# Altium PCB NEpic.PcbDoc (part 4 of 5)
Units mil, origin at the board's own origin, x right, y up, seen from the top; angles counter-clockwise.
Board outline 1660 x 1990 mil, 4 copper layers (Top Layer, GND, VCC, Bottom Layer); 30 components, 61 nets, 194 pads, 84 vias.
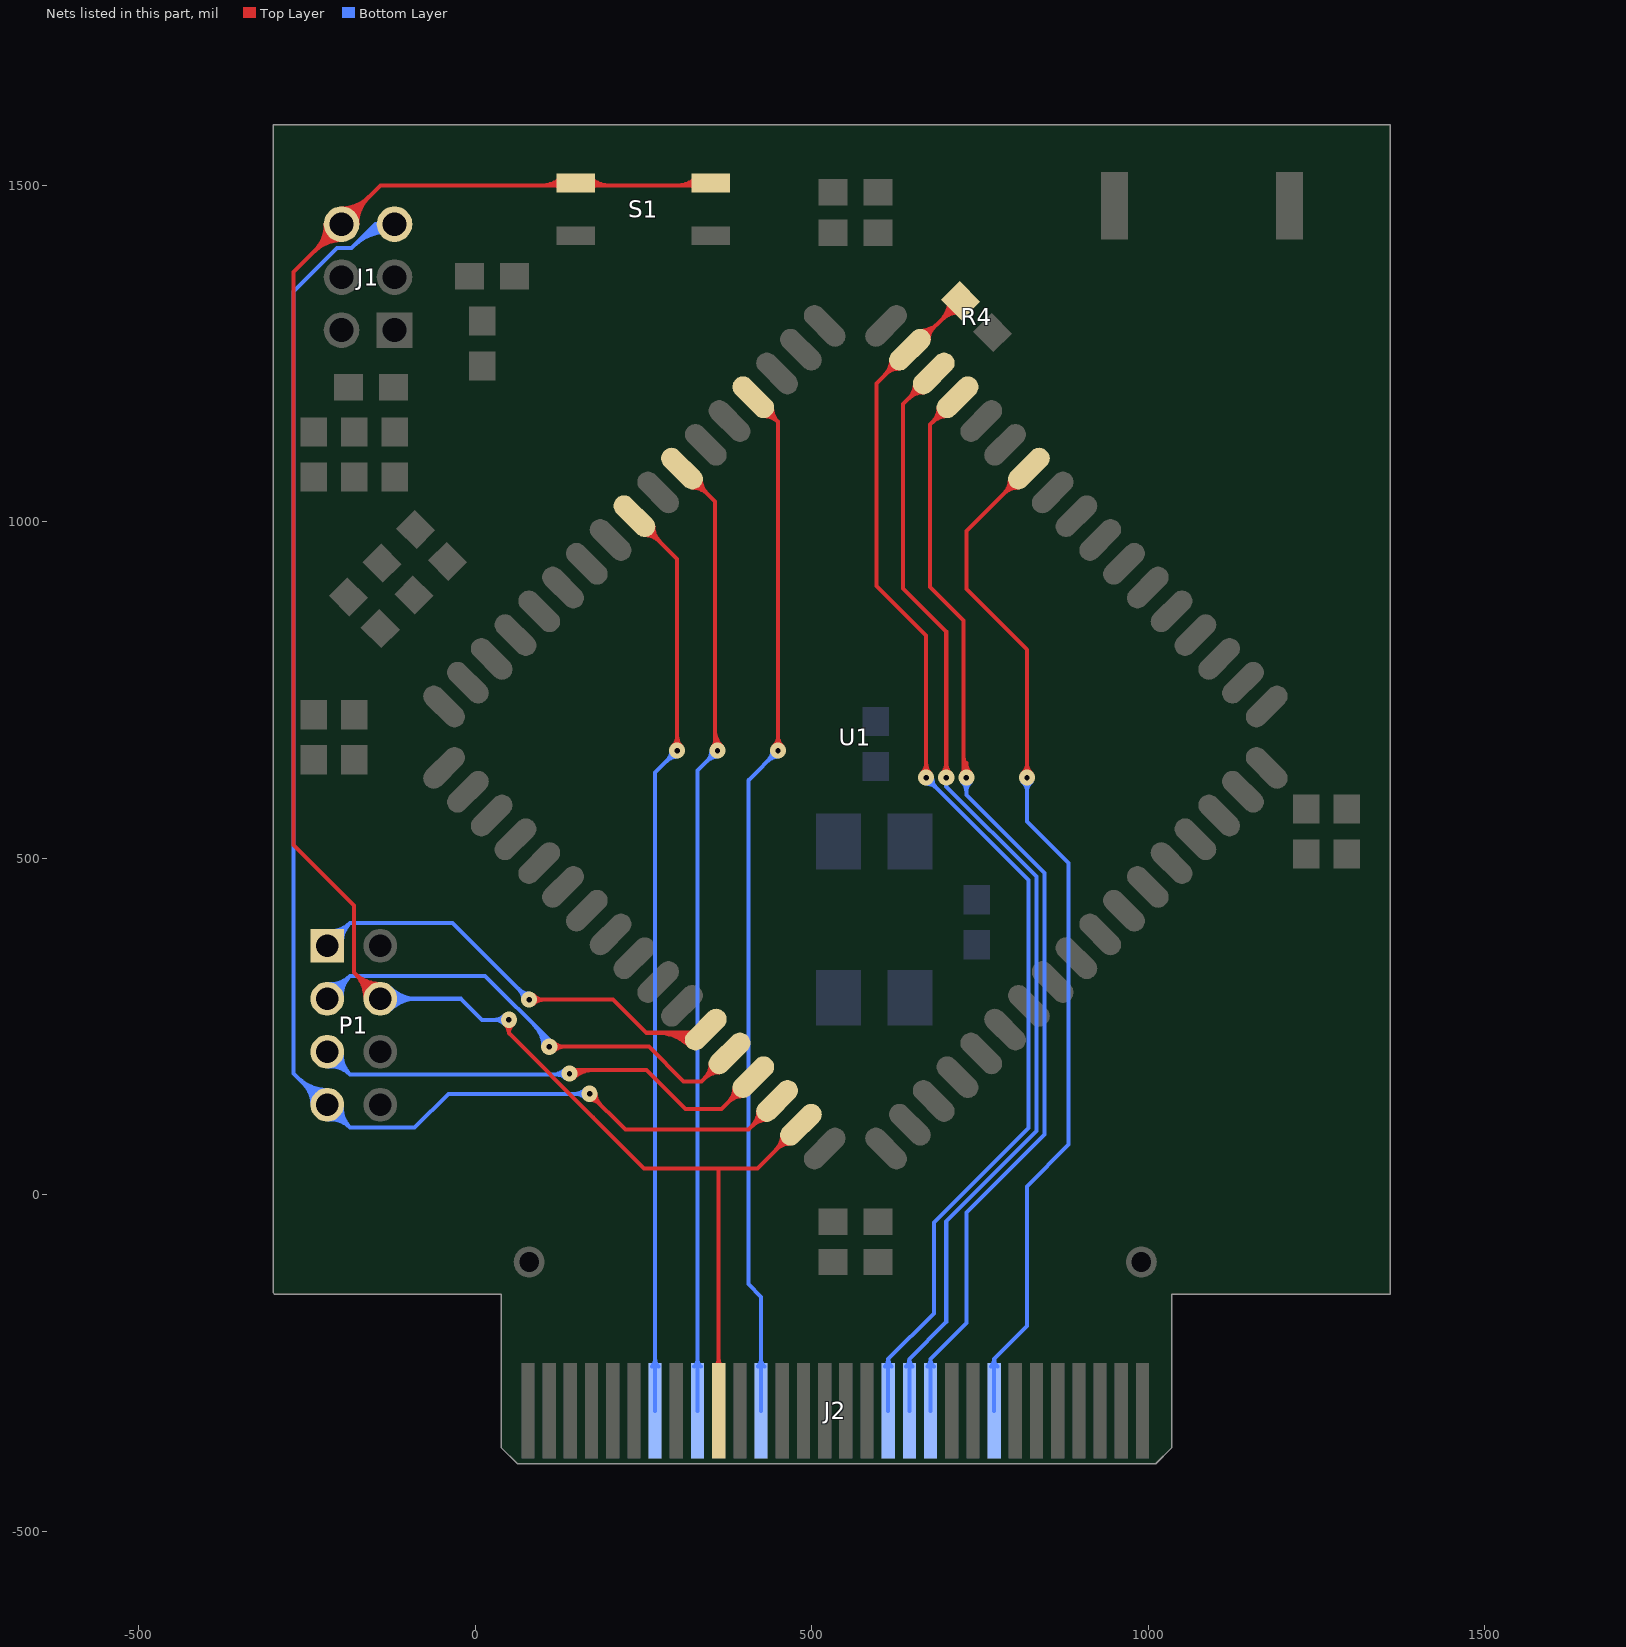
[diagram p6: the nets of this part, all layers, seen from the top]

## Via types
v1: diameter 24, hole 8, Top Layer to Bottom Layer, tented both sides, 78 vias
v2: diameter 150, hole 126, Top Layer to Bottom Layer, 4 vias
v3: diameter 40, hole 20, Top Layer to Bottom Layer, tented both sides, 2 vias

## Nets (pads, with @x,y where several pads share a name; then routed paths per layer and width w, separated by ;. In a path a pad name is that pad's centre, name@x,y a point inside that pad or via, vN(x,y) a via of type N, cw(c..) or ccw(c..) an arc to the next point about the centre after c; other vN are vias at no path point) (continued)
RADIO_CCA: J2.23 U1.49 | length 2254.2
  Top Layer w6: U1.49@681.37,1220.63 636,1175.26 636,1044 636,1014 636,901 700,837 v1(700,620) ; 644.29,1183.56 cw(c666.05,1161.79) U1.49@666.05,1192.57 ; 644.29,1183.56 ccw(c622.53,1205.32) U1.49@653.31,1205.32 ; 644.29,1183.56 cw(c666.05,1161.79) U1.49@666.05,1192.57 ; 644.29,1183.56 ccw(c622.53,1205.32) U1.49@653.31,1205.32 ; 644.29,1183.56 cw(c666.05,1161.79) U1.49@666.05,1192.57 ; 644.29,1183.56 ccw(c622.53,1205.32) U1.49@653.31,1205.32 ; 644.29,1183.56 ccw(c622.53,1205.32) U1.49@653.31,1205.32 ; 644.29,1183.56 cw(c666.05,1161.79) U1.49@666.05,1192.57 ; 654.54,1193.8 cw(c666.05,1182.28) U1.49@666.05,1198.57 ; 654.54,1193.8 ccw(c643.02,1205.32) U1.49@659.31,1205.32 ; 654.54,1193.8 cw(c666.05,1182.28) U1.49@666.05,1198.57 ; 654.54,1193.8 ccw(c643.02,1205.32) U1.49@659.31,1205.32 ; 654.54,1193.8 cw(c666.05,1182.28) U1.49@666.05,1198.57 ; 654.54,1193.8 ccw(c643.02,1205.32) U1.49@659.31,1205.32 ; 654.54,1193.8 ccw(c643.02,1205.32) U1.49@659.31,1205.32 ; 654.54,1193.8 cw(c666.05,1182.28) U1.49@666.05,1198.57 ; v1@693.64,626.36 ccw(c678.27,641.73) 700,641.73 ; v1@693.64,626.36 ccw(c678.27,641.73) 700,641.73 ; v1@693.64,626.36 ccw(c678.27,641.73) 700,641.73 ; v1@693.64,626.36 ccw(c678.27,641.73) 700,641.73 ; 700,641.73 ccw(c721.73,641.73) v1@706.36,626.36 ; 700,641.73 ccw(c721.73,641.73) v1@706.36,626.36 ; 700,641.73 ccw(c721.73,641.73) v1@706.36,626.36 ; 700,641.73 ccw(c721.73,641.73) v1@706.36,626.36
  Bottom Layer w6: J2.23@645.24,-321.26 645.24,-244 ; v1(700,620) 700,606.97 834,472.97 834,94.43 700,-39.57 700,-189.24 645.24,-244 ; J2.23@640.46,-255.34 ccw(c629.4,-244) 645.24,-244 ; J2.23@640.46,-255.34 ccw(c629.4,-244) 645.24,-244 ; J2.23@640.46,-255.34 ccw(c629.4,-244) 645.24,-244 ; J2.23@640.46,-255.34 ccw(c629.4,-244) 645.24,-244 ; 645.24,-244 ccw(c661.08,-244) J2.23@650.01,-255.34 ; 645.24,-244 ccw(c661.08,-244) J2.23@650.01,-255.34 ; 645.24,-244 ccw(c661.08,-244) J2.23@650.01,-255.34 ; 645.24,-244 ccw(c661.08,-244) J2.23@650.01,-255.34
RADIO_CS: J2.21 U1.48 | length 2350.8
  Top Layer w6: U1.48@716.72,1185.28 676,1144.55 676,1014 676,903.09 725.79,853.3 725.79,624.21 v1(730,620) ; 725.79,631.56 cw(c718.44,631.56) v1@723.64,626.36 ; 725.79,637.41 ccw(c747.41,637.41) v1@732.12,622.12 ; 725.79,651.89 ccw(c761.89,651.89) v1@736.36,626.36 ; 679.65,1148.2 cw(c701.41,1126.44) U1.48@701.41,1157.22 ; 679.65,1148.2 ccw(c657.89,1169.96) U1.48@688.66,1169.96 ; 679.65,1148.2 cw(c701.41,1126.44) U1.48@701.41,1157.22 ; 679.65,1148.2 ccw(c657.89,1169.96) U1.48@688.66,1169.96 ; 679.65,1148.2 cw(c701.41,1126.44) U1.48@701.41,1157.22 ; 679.65,1148.2 ccw(c657.89,1169.96) U1.48@688.66,1169.96 ; 679.65,1148.2 ccw(c657.89,1169.96) U1.48@688.66,1169.96 ; 679.65,1148.2 cw(c701.41,1126.44) U1.48@701.41,1157.22 ; 689.89,1158.45 cw(c701.41,1146.93) U1.48@701.41,1163.22 ; 689.89,1158.45 ccw(c678.37,1169.96) U1.48@694.66,1169.96 ; 689.89,1158.45 cw(c701.41,1146.93) U1.48@701.41,1163.22 ; 689.89,1158.45 ccw(c678.37,1169.96) U1.48@694.66,1169.96 ; 689.89,1158.45 cw(c701.41,1146.93) U1.48@701.41,1163.22 ; 689.89,1158.45 ccw(c678.37,1169.96) U1.48@694.66,1169.96 ; 689.89,1158.45 ccw(c678.37,1169.96) U1.48@694.66,1169.96 ; 689.89,1158.45 cw(c701.41,1146.93) U1.48@701.41,1163.22 ; v1@723.64,626.36 ccw(c708.27,641.73) 730,641.73 ; v1@723.64,626.36 ccw(c708.27,641.73) 730,641.73 ; v1@723.64,626.36 ccw(c708.27,641.73) 730,641.73 ; 730,641.73 ccw(c751.73,641.73) v1@736.36,626.36 ; 730,641.73 ccw(c751.73,641.73) v1@736.36,626.36 ; 730,641.73 ccw(c751.73,641.73) v1@736.36,626.36
  Bottom Layer w6: J2.21@676.73,-321.26 676.73,-244 ; v1(730,620) 730,593.94 846,477.94 846,89.46 730,-26.54 730,-190.73 676.73,-244 ; J2.21@671.95,-255.34 ccw(c660.89,-244) 676.73,-244 ; J2.21@671.95,-255.34 ccw(c660.89,-244) 676.73,-244 ; J2.21@671.95,-255.34 ccw(c660.89,-244) 676.73,-244 ; J2.21@671.95,-255.34 ccw(c660.89,-244) 676.73,-244 ; 676.73,-244 ccw(c692.57,-244) J2.21@681.51,-255.34 ; 676.73,-244 ccw(c692.57,-244) J2.21@681.51,-255.34 ; 676.73,-244 ccw(c692.57,-244) J2.21@681.51,-255.34 ; 676.73,-244 ccw(c692.57,-244) J2.21@681.51,-255.34 ; v1@723.64,613.64 cw(c708.27,598.27) 730,598.27 ; v1@723.64,613.64 cw(c708.27,598.27) 730,598.27 ; v1@723.64,613.64 cw(c708.27,598.27) 730,598.27 ; v1@723.64,613.64 cw(c708.27,598.27) 730,598.27 ; 730,598.27 cw(c751.73,598.27) v1@736.36,613.64 ; 730,598.27 cw(c751.73,598.27) v1@736.36,613.64 ; 730,598.27 cw(c751.73,598.27) v1@736.36,613.64 ; 730,598.27 cw(c751.73,598.27) v1@736.36,613.64
RADIO_SFD: J2.25 R4.1 U1.50 | length 2893
  Top Layer w6: v1(670,620) 670,831 596,905 596,1205.97 U1.50@646.01,1255.99 648.66,1255.99 R4.1@721.34,1328.66 ; 608.94,1218.91 cw(c630.7,1197.15) U1.50@630.7,1227.93 ; 608.94,1218.91 ccw(c587.18,1240.67) U1.50@617.95,1240.67 ; 608.94,1218.91 cw(c630.7,1197.15) U1.50@630.7,1227.93 ; 608.94,1218.91 ccw(c587.18,1240.67) U1.50@617.95,1240.67 ; 608.94,1218.91 cw(c630.7,1197.15) U1.50@630.7,1227.93 ; 608.94,1218.91 ccw(c587.18,1240.67) U1.50@617.95,1240.67 ; 608.94,1218.91 ccw(c587.18,1240.67) U1.50@617.95,1240.67 ; 608.94,1218.91 cw(c630.7,1197.15) U1.50@630.7,1227.93 ; 619.18,1229.16 cw(c630.7,1217.64) U1.50@630.7,1233.93 ; 619.18,1229.16 ccw(c607.66,1240.67) U1.50@623.95,1240.67 ; 619.18,1229.16 cw(c630.7,1217.64) U1.50@630.7,1233.93 ; 619.18,1229.16 ccw(c607.66,1240.67) U1.50@623.95,1240.67 ; 619.18,1229.16 cw(c630.7,1217.64) U1.50@630.7,1233.93 ; 619.18,1229.16 ccw(c607.66,1240.67) U1.50@623.95,1240.67 ; 619.18,1229.16 ccw(c607.66,1240.67) U1.50@623.95,1240.67 ; 619.18,1229.16 cw(c630.7,1217.64) U1.50@630.7,1233.93 ; v1@663.64,626.36 ccw(c648.27,641.73) 670,641.73 ; v1@663.64,626.36 ccw(c648.27,641.73) 670,641.73 ; v1@663.64,626.36 ccw(c648.27,641.73) 670,641.73 ; v1@663.64,626.36 ccw(c648.27,641.73) 670,641.73 ; 670,641.73 ccw(c691.73,641.73) v1@676.36,626.36 ; 670,641.73 ccw(c691.73,641.73) v1@676.36,626.36 ; 670,641.73 ccw(c691.73,641.73) v1@676.36,626.36 ; 670,641.73 ccw(c691.73,641.73) v1@676.36,626.36 ; 692.85,1300.18 cw(c721.34,1271.7) 721.34,1311.98 ccw(c721.34,1271.7) 692.85,1300.18 ; 692.85,1300.18 ccw(c664.37,1328.66) 704.65,1328.66 cw(c664.37,1328.66) 692.85,1300.18 ; 703.1,1310.42 cw(c721.34,1292.18) 721.34,1317.98 ccw(c721.34,1292.18) 703.1,1310.42 ; 703.1,1310.42 ccw(c684.86,1328.66) 710.65,1328.66 cw(c684.86,1328.66) 703.1,1310.42 ; U1.50@661.32,1278.05 ccw(c661.32,1300.73) 677.36,1284.69 cw(c661.32,1300.73) U1.50@661.32,1278.05 ; U1.50@661.32,1284.05 ccw(c661.32,1321.21) 687.61,1294.93 cw(c661.32,1321.21) U1.50@661.32,1284.05 ; U1.50@674.07,1271.3 cw(c698.45,1271.3) 681.21,1288.54 ccw(c698.45,1271.3) U1.50@674.07,1271.3
  Bottom Layer w6: J2.25@613.74,-321.26 613.74,-244 ; v1(670,620) 822,468 822,99.41 681.5,-41.09 681.5,-176.24 613.74,-244 ; J2.25@608.96,-255.34 ccw(c597.9,-244) 613.74,-244 ; J2.25@608.96,-255.34 ccw(c597.9,-244) 613.74,-244 ; J2.25@608.96,-255.34 ccw(c597.9,-244) 613.74,-244 ; J2.25@608.96,-255.34 ccw(c597.9,-244) 613.74,-244 ; 613.74,-244 ccw(c629.58,-244) J2.25@618.52,-255.34 ; 613.74,-244 ccw(c629.58,-244) J2.25@618.52,-255.34 ; 613.74,-244 ccw(c629.58,-244) J2.25@618.52,-255.34 ; 613.74,-244 ccw(c629.58,-244) J2.25@618.52,-255.34 ; v1@670,611 cw(c670,589.27) 685.36,604.64 ; v1@670,611 cw(c670,589.27) 685.36,604.64 ; v1@670,611 cw(c670,589.27) 685.36,604.64 ; v1@670,611 cw(c670,589.27) 685.36,604.64 ; v1@679,620 ccw(c700.73,620) 685.36,604.64 ; v1@679,620 ccw(c700.73,620) 685.36,604.64 ; v1@679,620 ccw(c700.73,620) 685.36,604.64 ; v1@679,620 ccw(c700.73,620) 685.36,604.64
RFTXRX: J2.15 U1.45 | length 2217.6
  Top Layer w6: v1(820,620) 820,810 730,900 730,986.42 U1.45@822.79,1079.21 ; 785.71,1042.14 cw(c807.48,1020.37) U1.45@807.48,1051.15 ; 785.71,1042.14 ccw(c763.95,1063.9) U1.45@794.73,1063.9 ; 785.71,1042.14 cw(c807.48,1020.37) U1.45@807.48,1051.15 ; 785.71,1042.14 ccw(c763.95,1063.9) U1.45@794.73,1063.9 ; 785.71,1042.14 cw(c807.48,1020.37) U1.45@807.48,1051.15 ; 785.71,1042.14 ccw(c763.95,1063.9) U1.45@794.73,1063.9 ; 785.71,1042.14 ccw(c763.95,1063.9) U1.45@794.73,1063.9 ; 785.71,1042.14 cw(c807.48,1020.37) U1.45@807.48,1051.15 ; 795.96,1052.38 cw(c807.48,1040.86) U1.45@807.48,1057.15 ; 795.96,1052.38 ccw(c784.44,1063.9) U1.45@800.73,1063.9 ; 795.96,1052.38 cw(c807.48,1040.86) U1.45@807.48,1057.15 ; 795.96,1052.38 ccw(c784.44,1063.9) U1.45@800.73,1063.9 ; 795.96,1052.38 ccw(c784.44,1063.9) U1.45@800.73,1063.9 ; 795.96,1052.38 cw(c807.48,1040.86) U1.45@807.48,1057.15 ; 795.96,1052.38 ccw(c784.44,1063.9) U1.45@800.73,1063.9 ; 795.96,1052.38 cw(c807.48,1040.86) U1.45@807.48,1057.15 ; v1@813.64,626.36 ccw(c798.27,641.73) 820,641.73 ; v1@813.64,626.36 ccw(c798.27,641.73) 820,641.73 ; v1@813.64,626.36 ccw(c798.27,641.73) 820,641.73 ; v1@813.64,626.36 ccw(c798.27,641.73) 820,641.73 ; 820,641.73 ccw(c841.73,641.73) v1@826.36,626.36 ; 820,641.73 ccw(c841.73,641.73) v1@826.36,626.36 ; 820,641.73 ccw(c841.73,641.73) v1@826.36,626.36 ; 820,641.73 ccw(c841.73,641.73) v1@826.36,626.36
  Bottom Layer w6: J2.15@771.22,-321.26 771.22,-244 ; v1(820,620) 820,554.85 882,492.85 882,74.55 820,12.55 820,-195.22 771.22,-244 ; J2.15@766.44,-255.34 ccw(c755.38,-244) 771.22,-244 ; J2.15@766.44,-255.34 ccw(c755.38,-244) 771.22,-244 ; J2.15@766.44,-255.34 ccw(c755.38,-244) 771.22,-244 ; J2.15@766.44,-255.34 ccw(c755.38,-244) 771.22,-244 ; 771.22,-244 ccw(c787.06,-244) J2.15@776,-255.34 ; 771.22,-244 ccw(c787.06,-244) J2.15@776,-255.34 ; 771.22,-244 ccw(c787.06,-244) J2.15@776,-255.34 ; 771.22,-244 ccw(c787.06,-244) J2.15@776,-255.34 ; v1@813.64,613.64 cw(c798.27,598.27) 820,598.27 ; v1@813.64,613.64 cw(c798.27,598.27) 820,598.27 ; v1@813.64,613.64 cw(c798.27,598.27) 820,598.27 ; v1@813.64,613.64 cw(c798.27,598.27) 820,598.27 ; 820,598.27 cw(c841.73,598.27) v1@826.36,613.64 ; 820,598.27 cw(c841.73,598.27) v1@826.36,613.64 ; 820,598.27 cw(c841.73,598.27) v1@826.36,613.64 ; 820,598.27 cw(c841.73,598.27) v1@826.36,613.64
RST: J1.6 J2.42 P1.4 S1.2 S1.4 U1.16 | length 7052.7
  Top Layer w6: P1.4@-141.26,291.26 -180,330 -180,430 -270,520 -270,1371.22 J1.6@-198.74,1442.48 -141.22,1500 S1.4@346.26,1500 ; v1(50,260) 50,240 ; J2.42@361.77,-321.26 361.77,39.22 ; U1.16@483.99,104.01 419.2,39.22 361.77,39.22 ; -238.86,1402.36 cw(c-198.74,1362.25) J1.6@-198.74,1418.98 ; -238.86,1402.36 ccw(c-278.98,1442.48) J1.6@-222.24,1442.48 ; -238.86,1402.36 cw(c-198.74,1362.25) J1.6@-198.74,1418.98 ; -238.86,1402.36 ccw(c-278.98,1442.48) J1.6@-222.24,1442.48 ; -238.86,1402.36 ccw(c-278.98,1442.48) J1.6@-222.24,1442.48 ; -238.86,1402.36 cw(c-198.74,1362.25) J1.6@-198.74,1418.98 ; -238.86,1402.36 ccw(c-278.98,1442.48) J1.6@-222.24,1442.48 ; -238.86,1402.36 cw(c-198.74,1362.25) J1.6@-198.74,1418.98 ; -228.61,1412.61 cw(c-198.74,1382.73) J1.6@-198.74,1424.98 ; -228.61,1412.61 ccw(c-258.49,1442.48) J1.6@-216.24,1442.48 ; -228.61,1412.61 cw(c-198.74,1382.73) J1.6@-198.74,1424.98 ; -228.61,1412.61 ccw(c-258.49,1442.48) J1.6@-216.24,1442.48 ; -228.61,1412.61 ccw(c-258.49,1442.48) J1.6@-216.24,1442.48 ; -228.61,1412.61 cw(c-198.74,1382.73) J1.6@-198.74,1424.98 ; -228.61,1412.61 ccw(c-258.49,1442.48) J1.6@-216.24,1442.48 ; -228.61,1412.61 cw(c-198.74,1382.73) J1.6@-198.74,1424.98 ; -218.37,1422.85 cw(c-198.74,1403.22) J1.6@-198.74,1430.98 ; -218.37,1422.85 ccw(c-238,1442.48) J1.6@-210.24,1442.48 ; -218.37,1422.85 cw(c-198.74,1403.22) J1.6@-198.74,1430.98 ; -218.37,1422.85 ccw(c-238,1442.48) J1.6@-210.24,1442.48 ; -218.37,1422.85 ccw(c-238,1442.48) J1.6@-210.24,1442.48 ; -218.37,1422.85 cw(c-198.74,1403.22) J1.6@-198.74,1430.98 ; -218.37,1422.85 ccw(c-238,1442.48) J1.6@-210.24,1442.48 ; -218.37,1422.85 cw(c-198.74,1403.22) J1.6@-198.74,1430.98 ; J1.6@-198.74,1453.98 ccw(c-198.74,1481.74) -179.11,1462.11 ; J1.6@-198.74,1453.98 ccw(c-198.74,1481.74) -179.11,1462.11 ; J1.6@-198.74,1453.98 ccw(c-198.74,1481.74) -179.11,1462.11 ; J1.6@-198.74,1453.98 ccw(c-198.74,1481.74) -179.11,1462.11 ; J1.6@-198.74,1459.98 ccw(c-198.74,1502.23) -168.87,1472.35 ; J1.6@-198.74,1459.98 ccw(c-198.74,1502.23) -168.87,1472.35 ; J1.6@-198.74,1459.98 ccw(c-198.74,1502.23) -168.87,1472.35 ; J1.6@-198.74,1459.98 ccw(c-198.74,1502.23) -168.87,1472.35 ; J1.6@-198.74,1465.98 ccw(c-198.74,1522.71) -158.62,1482.6 ; J1.6@-198.74,1465.98 ccw(c-198.74,1522.71) -158.62,1482.6 ; J1.6@-198.74,1465.98 ccw(c-198.74,1522.71) -158.62,1482.6 ; J1.6@-198.74,1465.98 ccw(c-198.74,1522.71) -158.62,1482.6 ; J1.6@-187.24,1442.48 cw(c-159.48,1442.48) -179.11,1462.11 ; J1.6@-187.24,1442.48 cw(c-159.48,1442.48) -179.11,1462.11 ; J1.6@-187.24,1442.48 cw(c-159.48,1442.48) -179.11,1462.11 ; J1.6@-187.24,1442.48 cw(c-159.48,1442.48) -179.11,1462.11 ; J1.6@-181.24,1442.48 cw(c-138.99,1442.48) -168.87,1472.35 ; J1.6@-181.24,1442.48 cw(c-138.99,1442.48) -168.87,1472.35 ; J1.6@-181.24,1442.48 cw(c-138.99,1442.48) -168.87,1472.35 ; J1.6@-181.24,1442.48 cw(c-138.99,1442.48) -168.87,1472.35 ; -178.82,328.82 cw(c-216.37,291.26) P1.4@-163.26,291.26 ; -178.82,328.82 ccw(c-141.26,366.37) P1.4@-141.26,313.26 ; -178.82,328.82 cw(c-216.37,291.26) P1.4@-163.26,291.26 ; -178.82,328.82 ccw(c-141.26,366.37) P1.4@-141.26,313.26 ; -178.82,328.82 ccw(c-141.26,366.37) P1.4@-141.26,313.26 ; -178.82,328.82 cw(c-216.37,291.26) P1.4@-163.26,291.26 ; -178.82,328.82 ccw(c-141.26,366.37) P1.4@-141.26,313.26 ; -178.82,328.82 cw(c-216.37,291.26) P1.4@-163.26,291.26 ; J1.6@-175.24,1442.48 cw(c-118.51,1442.48) -158.62,1482.6 ; J1.6@-175.24,1442.48 cw(c-118.51,1442.48) -158.62,1482.6 ; J1.6@-175.24,1442.48 cw(c-118.51,1442.48) -158.62,1482.6 ; J1.6@-175.24,1442.48 cw(c-118.51,1442.48) -158.62,1482.6 ; -168.57,318.57 cw(c-195.89,291.26) P1.4@-157.26,291.26 ; -168.57,318.57 ccw(c-141.26,345.89) P1.4@-141.26,307.26 ; -168.57,318.57 cw(c-195.89,291.26) P1.4@-157.26,291.26 ; -168.57,318.57 ccw(c-141.26,345.89) P1.4@-141.26,307.26 ; -168.57,318.57 ccw(c-141.26,345.89) P1.4@-141.26,307.26 ; -168.57,318.57 cw(c-195.89,291.26) P1.4@-157.26,291.26 ; -168.57,318.57 ccw(c-141.26,345.89) P1.4@-141.26,307.26 ; -168.57,318.57 cw(c-195.89,291.26) P1.4@-157.26,291.26 ; v1@44.03,253.26 cw(c32.28,240) 50,240 ; v1@44.03,253.26 cw(c32.28,240) 50,240 ; v1@44.03,253.26 cw(c32.28,240) 50,240 ; v1@44.03,253.26 cw(c32.28,240) 50,240 ; 50,240 cw(c67.72,240) v1@55.97,253.26 ; 50,240 cw(c67.72,240) v1@55.97,253.26 ; 50,240 cw(c67.72,240) v1@55.97,253.26 ; 50,240 cw(c67.72,240) v1@55.97,253.26 ; 50,240 174.56,115.44 250.78,39.22 361.77,39.22 ; 99.4,1500 ccw(c99.4,1538.79) S1.2@126.83,1511.36 ; 99.4,1500 ccw(c99.4,1538.79) S1.2@126.83,1511.36 ; 99.4,1500 ccw(c99.4,1538.79) S1.2@126.83,1511.36 ; 99.4,1500 ccw(c99.4,1538.79) S1.2@126.83,1511.36 ; 113.88,1500 ccw(c113.88,1524.31) S1.2@131.07,1507.12 ; 113.88,1500 ccw(c113.88,1524.31) S1.2@131.07,1507.12 ; 113.88,1500 ccw(c113.88,1524.31) S1.2@131.07,1507.12 ; 113.88,1500 ccw(c113.88,1524.31) S1.2@131.07,1507.12 ; 117.45,1500 cw(c117.45,1486.75) S1.2@126.83,1496.12 ; 117.45,1500 cw(c117.45,1486.75) S1.2@126.83,1496.12 ; 117.45,1500 cw(c117.45,1486.75) S1.2@126.83,1496.12 ; 117.45,1500 cw(c117.45,1486.75) S1.2@126.83,1496.12 ; S1.2@167.36,1507.12 ccw(c184.54,1524.31) 184.54,1500 ; S1.2@167.36,1507.12 ccw(c184.54,1524.31) 184.54,1500 ; S1.2@167.36,1507.12 ccw(c184.54,1524.31) 184.54,1500 ; S1.2@167.36,1507.12 ccw(c184.54,1524.31) 184.54,1500 ; S1.2@171.6,1496.12 cw(c180.97,1486.75) 180.97,1500 ; S1.2@171.6,1496.12 cw(c180.97,1486.75) 180.97,1500 ; S1.2@171.6,1496.12 cw(c180.97,1486.75) 180.97,1500 ; S1.2@171.6,1496.12 cw(c180.97,1486.75) 180.97,1500 ; S1.2@171.6,1511.36 ccw(c199.03,1538.79) 199.03,1500 ; S1.2@171.6,1511.36 ccw(c199.03,1538.79) 199.03,1500 ; S1.2@171.6,1511.36 ccw(c199.03,1538.79) 199.03,1500 ; S1.2@171.6,1511.36 ccw(c199.03,1538.79) 199.03,1500 ; 300.18,1500 ccw(c300.18,1538.79) S1.4@327.61,1511.36 ; 300.18,1500 ccw(c300.18,1538.79) S1.4@327.61,1511.36 ; 300.18,1500 ccw(c300.18,1538.79) S1.4@327.61,1511.36 ; 300.18,1500 ccw(c300.18,1538.79) S1.4@327.61,1511.36 ; 314.67,1500 ccw(c314.67,1524.31) S1.4@331.86,1507.12 ; 314.67,1500 ccw(c314.67,1524.31) S1.4@331.86,1507.12 ; 314.67,1500 ccw(c314.67,1524.31) S1.4@331.86,1507.12 ; 314.67,1500 ccw(c314.67,1524.31) S1.4@331.86,1507.12 ; 318.24,1500 cw(c318.24,1486.75) S1.4@327.61,1496.12 ; 318.24,1500 cw(c318.24,1486.75) S1.4@327.61,1496.12 ; 318.24,1500 cw(c318.24,1486.75) S1.4@327.61,1496.12 ; 318.24,1500 cw(c318.24,1486.75) S1.4@327.61,1496.12 ; J2.42@356.93,-255.4 ccw(c345.25,-243.72) 361.77,-243.72 ; J2.42@356.93,-255.4 ccw(c345.25,-243.72) 361.77,-243.72 ; J2.42@356.93,-255.4 ccw(c345.25,-243.72) 361.77,-243.72 ; J2.42@356.93,-255.4 ccw(c345.25,-243.72) 361.77,-243.72 ; 361.77,-243.72 ccw(c378.29,-243.72) J2.42@366.61,-255.4 ; 361.77,-243.72 ccw(c378.29,-243.72) J2.42@366.61,-255.4 ; 361.77,-243.72 ccw(c378.29,-243.72) J2.42@366.61,-255.4 ; 361.77,-243.72 ccw(c378.29,-243.72) J2.42@366.61,-255.4 ; 446.92,66.94 cw(c468.68,45.18) U1.16@468.68,75.95 ; 446.92,66.94 ccw(c425.15,88.7) U1.16@455.93,88.7 ; 446.92,66.94 cw(c468.68,45.18) U1.16@468.68,75.95 ; 446.92,66.94 ccw(c425.15,88.7) U1.16@455.93,88.7 ; 446.92,66.94 ccw(c425.15,88.7) U1.16@455.93,88.7 ; 446.92,66.94 cw(c468.68,45.18) U1.16@468.68,75.95 ; 446.92,66.94 ccw(c425.15,88.7) U1.16@455.93,88.7 ; 446.92,66.94 cw(c468.68,45.18) U1.16@468.68,75.95 ; 457.16,77.18 cw(c468.68,65.66) U1.16@468.68,81.95 ; 457.16,77.18 ccw(c445.64,88.7) U1.16@461.93,88.7 ; 457.16,77.18 cw(c468.68,65.66) U1.16@468.68,81.95 ; 457.16,77.18 ccw(c445.64,88.7) U1.16@461.93,88.7 ; 457.16,77.18 ccw(c445.64,88.7) U1.16@461.93,88.7 ; 457.16,77.18 cw(c468.68,65.66) U1.16@468.68,81.95 ; 457.16,77.18 ccw(c445.64,88.7) U1.16@461.93,88.7 ; 457.16,77.18 cw(c468.68,65.66) U1.16@468.68,81.95
  Bottom Layer w6: P1.4@-141.26,291.26 -21.26,291.26 10,260 v1(50,260) ; P1.4@-129.95,279.95 cw(c-102.63,252.63) -102.63,291.26 ; P1.4@-129.95,279.95 cw(c-102.63,252.63) -102.63,291.26 ; P1.4@-129.95,279.95 cw(c-102.63,252.63) -102.63,291.26 ; P1.4@-129.95,279.95 cw(c-102.63,252.63) -102.63,291.26 ; P1.4@-129.95,302.57 ccw(c-102.63,329.89) -102.63,291.26 ; P1.4@-129.95,302.57 ccw(c-102.63,329.89) -102.63,291.26 ; P1.4@-129.95,302.57 ccw(c-102.63,329.89) -102.63,291.26 ; P1.4@-129.95,302.57 ccw(c-102.63,329.89) -102.63,291.26 ; P1.4@-125.7,275.7 cw(c-88.15,238.15) -88.15,291.26 ; P1.4@-125.7,275.7 cw(c-88.15,238.15) -88.15,291.26 ; P1.4@-125.7,275.7 cw(c-88.15,238.15) -88.15,291.26 ; P1.4@-125.7,275.7 cw(c-88.15,238.15) -88.15,291.26 ; P1.4@-125.7,306.82 ccw(c-88.15,344.37) -88.15,291.26 ; P1.4@-125.7,306.82 ccw(c-88.15,344.37) -88.15,291.26 ; P1.4@-125.7,306.82 ccw(c-88.15,344.37) -88.15,291.26 ; P1.4@-125.7,306.82 ccw(c-88.15,344.37) -88.15,291.26 ; 28.27,260 cw(c28.27,238.27) v1@43.64,253.64 ; 28.27,260 ccw(c28.27,281.73) v1@43.64,266.36 ; 28.27,260 cw(c28.27,238.27) v1@43.64,253.64 ; 28.27,260 ccw(c28.27,281.73) v1@43.64,266.36 ; 28.27,260 ccw(c28.27,281.73) v1@43.64,266.36 ; 28.27,260 cw(c28.27,238.27) v1@43.64,253.64 ; 28.27,260 ccw(c28.27,281.73) v1@43.64,266.36 ; 28.27,260 cw(c28.27,238.27) v1@43.64,253.64
SCLK0/SCL: J2.43 U1.58 | length 2172.9
  Top Layer w6: U1.58@307.21,1079.21 356,1030.42 356,664 v1(360,660) ; U1.58@322.52,1051.15 cw(c322.52,1020.37) 344.29,1042.14 ; U1.58@322.52,1051.15 cw(c322.52,1020.37) 344.29,1042.14 ; U1.58@322.52,1051.15 cw(c322.52,1020.37) 344.29,1042.14 ; U1.58@322.52,1051.15 cw(c322.52,1020.37) 344.29,1042.14 ; U1.58@322.52,1057.15 cw(c322.52,1040.86) 334.04,1052.38 ; U1.58@322.52,1057.15 cw(c322.52,1040.86) 334.04,1052.38 ; U1.58@322.52,1057.15 cw(c322.52,1040.86) 334.04,1052.38 ; U1.58@322.52,1057.15 cw(c322.52,1040.86) 334.04,1052.38 ; U1.58@329.27,1063.9 ccw(c345.56,1063.9) 334.04,1052.38 ; U1.58@329.27,1063.9 ccw(c345.56,1063.9) 334.04,1052.38 ; U1.58@329.27,1063.9 ccw(c345.56,1063.9) 334.04,1052.38 ; U1.58@329.27,1063.9 ccw(c345.56,1063.9) 334.04,1052.38 ; U1.58@335.27,1063.9 ccw(c366.05,1063.9) 344.29,1042.14 ; U1.58@335.27,1063.9 ccw(c366.05,1063.9) 344.29,1042.14 ; U1.58@335.27,1063.9 ccw(c366.05,1063.9) 344.29,1042.14 ; U1.58@335.27,1063.9 ccw(c366.05,1063.9) 344.29,1042.14 ; v1@353.64,666.36 ccw(c347.93,672.07) 356,672.07 ; v1@353.64,666.36 ccw(c347.93,672.07) 356,672.07 ; v1@353.64,666.36 ccw(c347.93,672.07) 356,672.07 ; v1@353.64,666.36 ccw(c347.93,672.07) 356,672.07 ; 356,676.9 ccw(c376.9,676.9) v1@362.12,662.12 ; 356,676.9 ccw(c376.9,676.9) v1@362.12,662.12 ; 356,676.9 ccw(c376.9,676.9) v1@362.12,662.12 ; 356,676.9 ccw(c376.9,676.9) v1@362.12,662.12 ; 356,691.38 ccw(c391.38,691.38) v1@366.36,666.36 ; 356,691.38 ccw(c391.38,691.38) v1@366.36,666.36 ; 356,691.38 ccw(c391.38,691.38) v1@366.36,666.36 ; 356,691.38 ccw(c391.38,691.38) v1@366.36,666.36
  Bottom Layer w6: J2.43@330.28,-321.26 330.28,630.28 v1(360,660) ; J2.43@325.44,-255.4 ccw(c313.76,-243.72) 330.28,-243.72 ; J2.43@325.44,-255.4 ccw(c313.76,-243.72) 330.28,-243.72 ; J2.43@325.44,-255.4 ccw(c313.76,-243.72) 330.28,-243.72 ; J2.43@325.44,-255.4 ccw(c313.76,-243.72) 330.28,-243.72 ; 330.28,-243.72 ccw(c346.79,-243.72) J2.43@335.11,-255.4 ; 330.28,-243.72 ccw(c346.79,-243.72) J2.43@335.11,-255.4 ; 330.28,-243.72 ccw(c346.79,-243.72) J2.43@335.11,-255.4 ; 330.28,-243.72 ccw(c346.79,-243.72) J2.43@335.11,-255.4 ; 344.64,644.64 cw(c360,629.27) v1@360,651 ; 344.64,644.64 ccw(c329.27,660) v1@351,660 ; 344.64,644.64 cw(c360,629.27) v1@360,651 ; 344.64,644.64 ccw(c329.27,660) v1@351,660 ; 344.64,644.64 cw(c360,629.27) v1@360,651 ; 344.64,644.64 ccw(c329.27,660) v1@351,660 ; 344.64,644.64 ccw(c329.27,660) v1@351,660 ; 344.64,644.64 cw(c360,629.27) v1@360,651
STE0: J2.37 U1.55 | length 2103.1
  Top Layer w6: U1.55@413.28,1185.28 449.28,1149.28 ; v1(450,660) 450,1149.28 ; U1.55@429.05,1157.23 cw(c430.05,1130.05) 449.28,1149.28 ; U1.55@429.05,1157.23 cw(c430.05,1130.05) 449.28,1149.28 ; U1.55@429.05,1157.23 cw(c430.05,1130.05) 449.28,1149.28 ; U1.55@429.05,1157.23 cw(c430.05,1130.05) 449.28,1149.28 ; U1.55@441.33,1169.5 ccw(c468.51,1168.51) 449.28,1149.28 ; U1.55@441.33,1169.5 ccw(c468.51,1168.51) 449.28,1149.28 ; U1.55@441.33,1169.5 ccw(c468.51,1168.51) 449.28,1149.28 ; U1.55@441.33,1169.5 ccw(c468.51,1168.51) 449.28,1149.28 ; v1@443.64,666.36 ccw(c428.27,681.73) 450,681.73 ; v1@443.64,666.36 ccw(c428.27,681.73) 450,681.73 ; v1@443.64,666.36 ccw(c428.27,681.73) 450,681.73 ; v1@443.64,666.36 ccw(c428.27,681.73) 450,681.73 ; 450,681.73 ccw(c471.73,681.73) v1@456.36,666.36 ; 450,681.73 ccw(c471.73,681.73) v1@456.36,666.36 ; 450,681.73 ccw(c471.73,681.73) v1@456.36,666.36 ; 450,681.73 ccw(c471.73,681.73) v1@456.36,666.36
  Bottom Layer w6: J2.37@424.76,-321.26 424.76,-151.73 406,-132.97 406,616 v1(450,660) ; J2.37@419.93,-255.4 ccw(c408.24,-243.72) 424.76,-243.72 ; J2.37@419.93,-255.4 ccw(c408.24,-243.72) 424.76,-243.72 ; J2.37@419.93,-255.4 ccw(c408.24,-243.72) 424.76,-243.72 ; J2.37@419.93,-255.4 ccw(c408.24,-243.72) 424.76,-243.72 ; 424.76,-243.72 ccw(c441.28,-243.72) J2.37@429.6,-255.4 ; 424.76,-243.72 ccw(c441.28,-243.72) J2.37@429.6,-255.4 ; 424.76,-243.72 ccw(c441.28,-243.72) J2.37@429.6,-255.4 ; 424.76,-243.72 ccw(c441.28,-243.72) J2.37@429.6,-255.4 ; 434.64,644.64 cw(c450,629.27) v1@450,651 ; 434.64,644.64 ccw(c419.27,660) v1@441,660 ; 434.64,644.64 cw(c450,629.27) v1@450,651 ; 434.64,644.64 ccw(c419.27,660) v1@441,660 ; 434.64,644.64 cw(c450,629.27) v1@450,651 ; 434.64,644.64 ccw(c419.27,660) v1@441,660 ; 434.64,644.64 ccw(c419.27,660) v1@441,660 ; 434.64,644.64 cw(c450,629.27) v1@450,651
TCK: J1.5 P1.7 U1.15 | length 4736.8
  Top Layer w6: v1(170,150) 223.26,96.74 406,96.74 U1.15@448.63,139.37 ; v1@170,141 cw(c170,119.27) 185.36,134.64 ; v1@170,141 cw(c170,119.27) 185.36,134.64 ; v1@170,141 cw(c170,119.27) 185.36,134.64 ; v1@170,141 cw(c170,119.27) 185.36,134.64 ; v1@179,150 ccw(c200.73,150) 185.36,134.64 ; v1@179,150 ccw(c200.73,150) 185.36,134.64 ; v1@179,150 ccw(c200.73,150) 185.36,134.64 ; v1@179,150 ccw(c200.73,150) 185.36,134.64 ; 411.56,102.3 cw(c433.32,80.53) U1.15@433.32,111.31 ; 411.56,102.3 ccw(c389.8,124.06) U1.15@420.57,124.06 ; 411.56,102.3 cw(c433.32,80.53) U1.15@433.32,111.31 ; 411.56,102.3 ccw(c389.8,124.06) U1.15@420.57,124.06 ; 411.56,102.3 cw(c433.32,80.53) U1.15@433.32,111.31 ; 411.56,102.3 ccw(c389.8,124.06) U1.15@420.57,124.06 ; 411.56,102.3 ccw(c389.8,124.06) U1.15@420.57,124.06 ; 411.56,102.3 cw(c433.32,80.53) U1.15@433.32,111.31 ; 421.8,112.54 cw(c433.32,101.02) U1.15@433.32,117.31 ; 421.8,112.54 ccw(c410.28,124.06) U1.15@426.57,124.06 ; 421.8,112.54 cw(c433.32,101.02) U1.15@433.32,117.31 ; 421.8,112.54 ccw(c410.28,124.06) U1.15@426.57,124.06 ; 421.8,112.54 ccw(c410.28,124.06) U1.15@426.57,124.06 ; 421.8,112.54 cw(c433.32,101.02) U1.15@433.32,117.31 ; 421.8,112.54 ccw(c410.28,124.06) U1.15@426.57,124.06 ; 421.8,112.54 cw(c433.32,101.02) U1.15@433.32,117.31
  Bottom Layer w6: J1.5@-120,1442.48 -148.54,1442.48 -184.04,1406.98 -205.7,1406.98 -270,1342.68 -270,180 -223.78,133.78 P1.7@-220,133.78 -186,99.78 ; v1(170,150) -40,150 -90.22,99.78 -186,99.78 ; -264.01,174.01 ccw(c-220,218.02) P1.7@-220,155.78 ; -264.01,174.01 ccw(c-220,218.02) P1.7@-220,155.78 ; -264.01,174.01 ccw(c-220,218.02) P1.7@-220,155.78 ; -264.01,174.01 ccw(c-220,218.02) P1.7@-220,155.78 ; -254.88,164.88 cw(c-285.99,133.78) P1.7@-242,133.78 ; -254.88,164.88 cw(c-285.99,133.78) P1.7@-242,133.78 ; -254.88,164.88 cw(c-285.99,133.78) P1.7@-242,133.78 ; -254.88,164.88 cw(c-285.99,133.78) P1.7@-242,133.78 ; -253.77,163.77 ccw(c-220,197.53) P1.7@-220,149.78 ; -253.77,163.77 ccw(c-220,197.53) P1.7@-220,149.78 ; -253.77,163.77 ccw(c-220,197.53) P1.7@-220,149.78 ; -253.77,163.77 ccw(c-220,197.53) P1.7@-220,149.78 ; -244.64,154.64 cw(c-265.5,133.78) P1.7@-236,133.78 ; -244.64,154.64 cw(c-265.5,133.78) P1.7@-236,133.78 ; -244.64,154.64 cw(c-265.5,133.78) P1.7@-236,133.78 ; -244.64,154.64 cw(c-265.5,133.78) P1.7@-236,133.78 ; -243.52,153.52 ccw(c-220,177.05) P1.7@-220,143.78 ; -243.52,153.52 ccw(c-220,177.05) P1.7@-220,143.78 ; -243.52,153.52 ccw(c-220,177.05) P1.7@-220,143.78 ; -243.52,153.52 ccw(c-220,177.05) P1.7@-220,143.78 ; P1.7@-218.84,117.82 cw(c-216.64,87.69) -195.27,109.05 ; P1.7@-218.84,117.82 cw(c-216.64,87.69) -195.27,109.05 ; P1.7@-218.84,117.82 cw(c-216.64,87.69) -195.27,109.05 ; P1.7@-218.84,117.82 cw(c-216.64,87.69) -195.27,109.05 ; P1.7@-218.4,111.84 cw(c-215.38,70.41) -186,99.78 ; P1.7@-218.4,111.84 cw(c-215.38,70.41) -186,99.78 ; P1.7@-218.4,111.84 cw(c-215.38,70.41) -186,99.78 ; P1.7@-218.4,111.84 cw(c-215.38,70.41) -186,99.78 ; P1.7@-204.04,132.62 ccw(c-173.91,130.42) -195.27,109.05 ; P1.7@-204.04,132.62 ccw(c-173.91,130.42) -195.27,109.05 ; P1.7@-204.04,132.62 ccw(c-173.91,130.42) -195.27,109.05 ; P1.7@-204.04,132.62 ccw(c-173.91,130.42) -195.27,109.05 ; P1.7@-198.06,132.18 ccw(c-156.63,129.16) -186,99.78 ; P1.7@-198.06,132.18 ccw(c-156.63,129.16) -186,99.78 ; P1.7@-198.06,132.18 ccw(c-156.63,129.16) -186,99.78 ; P1.7@-198.06,132.18 ccw(c-156.63,129.16) -186,99.78 ; -180.71,1410.31 cw(c-129.5,1359.1) J1.5@-121.3,1431.05 ; -180.71,1410.31 cw(c-129.5,1359.1) J1.5@-121.3,1431.05 ; -180.71,1410.31 cw(c-129.5,1359.1) J1.5@-121.3,1431.05 ; -180.71,1410.31 cw(c-129.5,1359.1) J1.5@-121.3,1431.05 ; -171.91,1419.1 cw(c-127.7,1374.89) J1.5@-120.62,1437.02 ; -171.91,1419.1 cw(c-127.7,1374.89) J1.5@-120.62,1437.02 ; -171.91,1419.1 cw(c-127.7,1374.89) J1.5@-120.62,1437.02 ; -171.91,1419.1 cw(c-127.7,1374.89) J1.5@-120.62,1437.02 ; -163.12,1427.9 cw(c-125.9,1390.69) J1.5@-119.94,1442.98 ; -163.12,1427.9 cw(c-125.9,1390.69) J1.5@-119.94,1442.98 ; -163.12,1427.9 cw(c-125.9,1390.69) J1.5@-119.94,1442.98 ; -163.12,1427.9 cw(c-125.9,1390.69) J1.5@-119.94,1442.98 ; -154.32,1436.7 cw(c-124.1,1406.48) J1.5@-119.26,1448.94 ; -154.32,1436.7 cw(c-124.1,1406.48) J1.5@-119.26,1448.94 ; -154.32,1436.7 cw(c-124.1,1406.48) J1.5@-119.26,1448.94 ; -154.32,1436.7 cw(c-124.1,1406.48) J1.5@-119.26,1448.94 ; 148.27,150 cw(c148.27,128.27) v1@163.64,143.64 ; 148.27,150 ccw(c148.27,171.73) v1@163.64,156.36 ; 148.27,150 cw(c148.27,128.27) v1@163.64,143.64 ; 148.27,150 ccw(c148.27,171.73) v1@163.64,156.36 ; 148.27,150 ccw(c148.27,171.73) v1@163.64,156.36 ; 148.27,150 cw(c148.27,128.27) v1@163.64,143.64 ; 148.27,150 ccw(c148.27,171.73) v1@163.64,156.36 ; 148.27,150 cw(c148.27,128.27) v1@163.64,143.64
TDI/TCLK: P1.3 U1.13 | length 1921
  Top Layer w6: v1(110,220) 257.9,220 309.74,168.16 336,168.16 U1.13@377.92,210.08 ; v1@116.36,213.64 cw(c131.73,198.27) 131.73,220 ; v1@116.36,213.64 cw(c131.73,198.27) 131.73,220 ; v1@116.36,213.64 cw(c131.73,198.27) 131.73,220 ; v1@116.36,213.64 cw(c131.73,198.27) 131.73,220 ; v1@116.36,226.36 ccw(c131.73,241.73) 131.73,220 ; v1@116.36,226.36 ccw(c131.73,241.73) 131.73,220 ; v1@116.36,226.36 ccw(c131.73,241.73) 131.73,220 ; v1@116.36,226.36 ccw(c131.73,241.73) 131.73,220 ; 340.85,173.01 cw(c362.61,151.24) U1.13@362.61,182.02 ; 340.85,173.01 ccw(c319.09,194.77) U1.13@349.86,194.77 ; 340.85,173.01 cw(c362.61,151.24) U1.13@362.61,182.02 ; 340.85,173.01 ccw(c319.09,194.77) U1.13@349.86,194.77 ; 340.85,173.01 cw(c362.61,151.24) U1.13@362.61,182.02 ; 340.85,173.01 ccw(c319.09,194.77) U1.13@349.86,194.77 ; 340.85,173.01 ccw(c319.09,194.77) U1.13@349.86,194.77 ; 340.85,173.01 cw(c362.61,151.24) U1.13@362.61,182.02 ; 351.09,183.25 cw(c362.61,171.73) U1.13@362.61,188.02 ; 351.09,183.25 ccw(c339.57,194.77) U1.13@355.86,194.77 ; 351.09,183.25 cw(c362.61,171.73) U1.13@362.61,188.02 ; 351.09,183.25 ccw(c339.57,194.77) U1.13@355.86,194.77 ; 351.09,183.25 ccw(c339.57,194.77) U1.13@355.86,194.77 ; 351.09,183.25 cw(c362.61,171.73) U1.13@362.61,188.02 ; 351.09,183.25 ccw(c339.57,194.77) U1.13@355.86,194.77 ; 351.09,183.25 cw(c362.61,171.73) U1.13@362.61,188.02
  Bottom Layer w6: P1.3@-220,291.26 -186,325.26 ; v1(110,220) 110,230 14.74,325.26 -186,325.26 ; P1.3@-218.84,307.22 ccw(c-216.64,337.35) -195.27,315.99 ; P1.3@-218.84,307.22 ccw(c-216.64,337.35) -195.27,315.99 ; P1.3@-218.84,307.22 ccw(c-216.64,337.35) -195.27,315.99 ; P1.3@-218.84,307.22 ccw(c-216.64,337.35) -195.27,315.99 ; P1.3@-218.4,313.2 ccw(c-215.38,354.63) -186,325.26 ; P1.3@-218.4,313.2 ccw(c-215.38,354.63) -186,325.26 ; P1.3@-218.4,313.2 ccw(c-215.38,354.63) -186,325.26 ; P1.3@-218.4,313.2 ccw(c-215.38,354.63) -186,325.26 ; P1.3@-204.04,292.42 cw(c-173.91,294.62) -195.27,315.99 ; P1.3@-204.04,292.42 cw(c-173.91,294.62) -195.27,315.99 ; P1.3@-204.04,292.42 cw(c-173.91,294.62) -195.27,315.99 ; P1.3@-204.04,292.42 cw(c-173.91,294.62) -195.27,315.99 ; P1.3@-198.06,292.86 cw(c-156.63,295.88) -186,325.26 ; P1.3@-198.06,292.86 cw(c-156.63,295.88) -186,325.26 ; P1.3@-198.06,292.86 cw(c-156.63,295.88) -186,325.26 ; P1.3@-198.06,292.86 cw(c-156.63,295.88) -186,325.26 ; 87.56,252.44 cw(c55.13,220) v1@101,220 ; 87.56,252.44 cw(c55.13,220) v1@101,220 ; 87.56,252.44 cw(c55.13,220) v1@101,220 ; 87.56,252.44 cw(c55.13,220) v1@101,220 ; 97.81,242.19 cw(c75.62,220) v1@107,220 ; 97.81,242.19 cw(c75.62,220) v1@107,220 ; 97.81,242.19 cw(c75.62,220) v1@107,220 ; 97.81,242.19 cw(c75.62,220) v1@107,220 ; 108.05,231.95 cw(c96.1,220) v1@113,220 ; 108.05,231.95 cw(c96.1,220) v1@113,220 ; 108.05,231.95 cw(c96.1,220) v1@113,220 ; 108.05,231.95 cw(c96.1,220) v1@113,220
TDO/TDI: P1.1 U1.12 | length 1980.7
  Top Layer w6: v1(80,290) 204.87,290 254.14,240.73 337.86,240.73 U1.12@342.57,245.44 ; v1@86.36,283.64 cw(c101.73,268.27) 101.73,290 ; v1@86.36,283.64 cw(c101.73,268.27) 101.73,290 ; v1@86.36,283.64 cw(c101.73,268.27) 101.73,290 ; v1@86.36,283.64 cw(c101.73,268.27) 101.73,290 ; v1@86.36,296.36 ccw(c101.73,311.73) 101.73,290 ; v1@86.36,296.36 ccw(c101.73,311.73) 101.73,290 ; v1@86.36,296.36 ccw(c101.73,311.73) 101.73,290 ; v1@86.36,296.36 ccw(c101.73,311.73) 101.73,290 ; 270.88,240.73 cw(c270.88,173.74) U1.12@318.24,221.11 ; 270.88,240.73 cw(c270.88,173.74) U1.12@318.24,221.11 ; 270.88,240.73 cw(c270.88,173.74) U1.12@318.24,221.11 ; 270.88,240.73 cw(c270.88,173.74) U1.12@318.24,221.11 ; 285.36,240.73 cw(c285.36,188.23) U1.12@322.49,225.35 ; 285.36,240.73 cw(c285.36,188.23) U1.12@322.49,225.35 ; 285.36,240.73 cw(c285.36,188.23) U1.12@322.49,225.35 ; 285.36,240.73 cw(c285.36,188.23) U1.12@322.49,225.35 ; 299.85,240.73 cw(c299.85,202.71) U1.12@326.73,229.6 ; 299.85,240.73 cw(c299.85,202.71) U1.12@326.73,229.6 ; 299.85,240.73 cw(c299.85,202.71) U1.12@326.73,229.6 ; 299.85,240.73 cw(c299.85,202.71) U1.12@326.73,229.6 ; 314.33,240.73 cw(c314.33,217.2) U1.12@330.97,233.84 ; 314.33,240.73 cw(c314.33,217.2) U1.12@330.97,233.84 ; 314.33,240.73 cw(c314.33,217.2) U1.12@330.97,233.84 ; 314.33,240.73 cw(c314.33,217.2) U1.12@330.97,233.84
  Bottom Layer w6: P1.1@-220,370 -186,404 ; v1(80,290) -34,404 -186,404 ; P1.1@-218.84,385.96 ccw(c-216.64,416.09) P1.1@-195.27,394.73 ; P1.1@-218.84,385.96 ccw(c-216.64,416.09) P1.1@-195.27,394.73 ; P1.1@-218.84,385.96 ccw(c-216.64,416.09) P1.1@-195.27,394.73 ; P1.1@-218.84,385.96 ccw(c-216.64,416.09) P1.1@-195.27,394.73 ; P1.1@-218.4,391.94 ccw(c-215.38,433.37) -186,404 ; P1.1@-218.4,391.94 ccw(c-215.38,433.37) -186,404 ; P1.1@-218.4,391.94 ccw(c-215.38,433.37) -186,404 ; P1.1@-218.4,391.94 ccw(c-215.38,433.37) -186,404 ; P1.1@-204.04,371.16 cw(c-173.91,373.36) P1.1@-195.27,394.73 ; P1.1@-204.04,371.16 cw(c-173.91,373.36) P1.1@-195.27,394.73 ; P1.1@-204.04,371.16 cw(c-173.91,373.36) P1.1@-195.27,394.73 ; P1.1@-204.04,371.16 cw(c-173.91,373.36) P1.1@-195.27,394.73 ; P1.1@-198.06,371.6 cw(c-156.63,374.62) -186,404 ; P1.1@-198.06,371.6 cw(c-156.63,374.62) -186,404 ; P1.1@-198.06,371.6 cw(c-156.63,374.62) -186,404 ; P1.1@-198.06,371.6 cw(c-156.63,374.62) -186,404 ; 64.64,305.36 cw(c49.27,290) v1@71,290 ; 64.64,305.36 ccw(c80,320.73) v1@80,299 ; 64.64,305.36 cw(c49.27,290) v1@71,290 ; 64.64,305.36 ccw(c80,320.73) v1@80,299 ; 64.64,305.36 ccw(c80,320.73) v1@80,299 ; 64.64,305.36 cw(c49.27,290) v1@71,290 ; 64.64,305.36 ccw(c80,320.73) v1@80,299 ; 64.64,305.36 cw(c49.27,290) v1@71,290
TMS: P1.5 U1.14 | length 1826.4
  Top Layer w6: v1(140,180) 145.44,185.44 254.56,185.44 312.55,127.45 366,127.45 U1.14@413.28,174.72 ; v1@142.12,177.88 cw(c160.37,159.63) 160.37,185.44 ; v1@142.12,177.88 cw(c160.37,159.63) 160.37,185.44 ; v1@142.12,177.88 cw(c160.37,159.63) 160.37,185.44 ; v1@142.12,177.88 cw(c160.37,159.63) 160.37,185.44 ; v1@146.36,173.64 cw(c174.85,145.15) 174.85,185.44 ; v1@146.36,173.64 cw(c174.85,145.15) 174.85,185.44 ; v1@146.36,173.64 cw(c174.85,145.15) 174.85,185.44 ; v1@146.36,173.64 cw(c174.85,145.15) 174.85,185.44 ; 376.2,137.65 cw(c397.97,115.89) U1.14@397.97,146.66 ; 376.2,137.65 ccw(c354.44,159.41) U1.14@385.22,159.41 ; 376.2,137.65 cw(c397.97,115.89) U1.14@397.97,146.66 ; 376.2,137.65 ccw(c354.44,159.41) U1.14@385.22,159.41 ; 376.2,137.65 cw(c397.97,115.89) U1.14@397.97,146.66 ; 376.2,137.65 ccw(c354.44,159.41) U1.14@385.22,159.41 ; 376.2,137.65 ccw(c354.44,159.41) U1.14@385.22,159.41 ; 376.2,137.65 cw(c397.97,115.89) U1.14@397.97,146.66 ; 386.45,147.89 cw(c397.97,136.37) U1.14@397.97,152.66 ; 386.45,147.89 ccw(c374.93,159.41) U1.14@391.22,159.41 ; 386.45,147.89 cw(c397.97,136.37) U1.14@397.97,152.66 ; 386.45,147.89 ccw(c374.93,159.41) U1.14@391.22,159.41 ; 386.45,147.89 ccw(c374.93,159.41) U1.14@391.22,159.41 ; 386.45,147.89 cw(c397.97,136.37) U1.14@397.97,152.66 ; 386.45,147.89 ccw(c374.93,159.41) U1.14@391.22,159.41 ; 386.45,147.89 cw(c397.97,136.37) U1.14@397.97,152.66
  Bottom Layer w6: P1.5@-220,212.52 -186,178.52 ; v1(140,180) 138.52,178.52 -186,178.52 ; P1.5@-218.84,196.56 cw(c-216.64,166.43) -195.27,187.79 ; P1.5@-218.84,196.56 cw(c-216.64,166.43) -195.27,187.79 ; P1.5@-218.84,196.56 cw(c-216.64,166.43) -195.27,187.79 ; P1.5@-218.84,196.56 cw(c-216.64,166.43) -195.27,187.79 ; P1.5@-218.4,190.58 cw(c-215.38,149.15) -186,178.52 ; P1.5@-218.4,190.58 cw(c-215.38,149.15) -186,178.52 ; P1.5@-218.4,190.58 cw(c-215.38,149.15) -186,178.52 ; P1.5@-218.4,190.58 cw(c-215.38,149.15) -186,178.52 ; P1.5@-204.04,211.36 ccw(c-173.91,209.16) -195.27,187.79 ; P1.5@-204.04,211.36 ccw(c-173.91,209.16) -195.27,187.79 ; P1.5@-204.04,211.36 ccw(c-173.91,209.16) -195.27,187.79 ; P1.5@-204.04,211.36 ccw(c-173.91,209.16) -195.27,187.79 ; P1.5@-198.06,210.92 ccw(c-156.63,207.9) -186,178.52 ; P1.5@-198.06,210.92 ccw(c-156.63,207.9) -186,178.52 ; P1.5@-198.06,210.92 ccw(c-156.63,207.9) -186,178.52 ; P1.5@-198.06,210.92 ccw(c-156.63,207.9) -186,178.52 ; 114.7,178.52 ccw(c114.7,205.3) v1@133.64,186.36 ; 114.7,178.52 ccw(c114.7,205.3) v1@133.64,186.36 ; 114.7,178.52 ccw(c114.7,205.3) v1@133.64,186.36 ; 114.7,178.52 ccw(c114.7,205.3) v1@133.64,186.36 ; 121.85,178.52 cw(c121.85,161.85) v1@133.64,173.64 ; 121.85,178.52 cw(c121.85,161.85) v1@133.64,173.64 ; 121.85,178.52 cw(c121.85,161.85) v1@133.64,173.64 ; 121.85,178.52 cw(c121.85,161.85) v1@133.64,173.64
UART0RX: J2.47 U1.60 | length 2042.2
  Top Layer w6: U1.60@236.5,1008.5 300,945 v1(300,660) ; U1.60@251.81,980.44 cw(c251.81,949.66) 273.58,971.42 ; U1.60@251.81,980.44 cw(c251.81,949.66) 273.58,971.42 ; U1.60@251.81,980.44 cw(c251.81,949.66) 273.58,971.42 ; U1.60@251.81,980.44 cw(c251.81,949.66) 273.58,971.42 ; U1.60@251.81,986.44 cw(c251.81,970.15) 263.33,981.67 ; U1.60@251.81,986.44 cw(c251.81,970.15) 263.33,981.67 ; U1.60@251.81,986.44 cw(c251.81,970.15) 263.33,981.67 ; U1.60@251.81,986.44 cw(c251.81,970.15) 263.33,981.67 ; U1.60@258.56,993.19 ccw(c274.85,993.19) 263.33,981.67 ; U1.60@258.56,993.19 ccw(c274.85,993.19) 263.33,981.67 ; U1.60@258.56,993.19 ccw(c274.85,993.19) 263.33,981.67 ; U1.60@258.56,993.19 ccw(c274.85,993.19) 263.33,981.67 ; U1.60@264.56,993.19 ccw(c295.34,993.19) 273.58,971.42 ; U1.60@264.56,993.19 ccw(c295.34,993.19) 273.58,971.42 ; U1.60@264.56,993.19 ccw(c295.34,993.19) 273.58,971.42 ; U1.60@264.56,993.19 ccw(c295.34,993.19) 273.58,971.42 ; v1@293.64,666.36 ccw(c278.27,681.73) 300,681.73 ; v1@293.64,666.36 ccw(c278.27,681.73) 300,681.73 ; v1@293.64,666.36 ccw(c278.27,681.73) 300,681.73 ; v1@293.64,666.36 ccw(c278.27,681.73) 300,681.73 ; 300,681.73 ccw(c321.73,681.73) v1@306.36,666.36 ; 300,681.73 ccw(c321.73,681.73) v1@306.36,666.36 ; 300,681.73 ccw(c321.73,681.73) v1@306.36,666.36 ; 300,681.73 ccw(c321.73,681.73) v1@306.36,666.36
  Bottom Layer w6: J2.47@267.28,-321.26 267.28,627.28 v1(300,660) ; J2.47@262.45,-255.4 ccw(c250.76,-243.72) 267.28,-243.72 ; J2.47@262.45,-255.4 ccw(c250.76,-243.72) 267.28,-243.72 ; J2.47@262.45,-255.4 ccw(c250.76,-243.72) 267.28,-243.72 ; J2.47@262.45,-255.4 ccw(c250.76,-243.72) 267.28,-243.72 ; 267.28,-243.72 ccw(c283.8,-243.72) J2.47@272.12,-255.4 ; 267.28,-243.72 ccw(c283.8,-243.72) J2.47@272.12,-255.4 ; 267.28,-243.72 ccw(c283.8,-243.72) J2.47@272.12,-255.4 ; 267.28,-243.72 ccw(c283.8,-243.72) J2.47@272.12,-255.4 ; 284.64,644.64 cw(c300,629.27) v1@300,651 ; 284.64,644.64 ccw(c269.27,660) v1@291,660 ; 284.64,644.64 cw(c300,629.27) v1@300,651 ; 284.64,644.64 ccw(c269.27,660) v1@291,660 ; 284.64,644.64 ccw(c269.27,660) v1@291,660 ; 284.64,644.64 cw(c300,629.27) v1@300,651 ; 284.64,644.64 ccw(c269.27,660) v1@291,660 ; 284.64,644.64 cw(c300,629.27) v1@300,651

## Text inside footprints (layer, text, board x,y; h text height)
J2: Top Overlay "2" at 934,-190 h60; Top Overlay "60" at 110,-180 h60
P1: Top Overlay "7  8" at -240,40 h30; Top Overlay "1  2" at -228.86,438.9 h30